# Altium PCB BopitPCB.PcbDoc
Units mil, origin at the board's own origin, x right, y up, seen from the top; angles counter-clockwise.
Board outline 3455 x 2045 mil, 2 copper layers (Top Layer, Bottom Layer); 18 components, 17 nets, 72 pads, 2 vias.
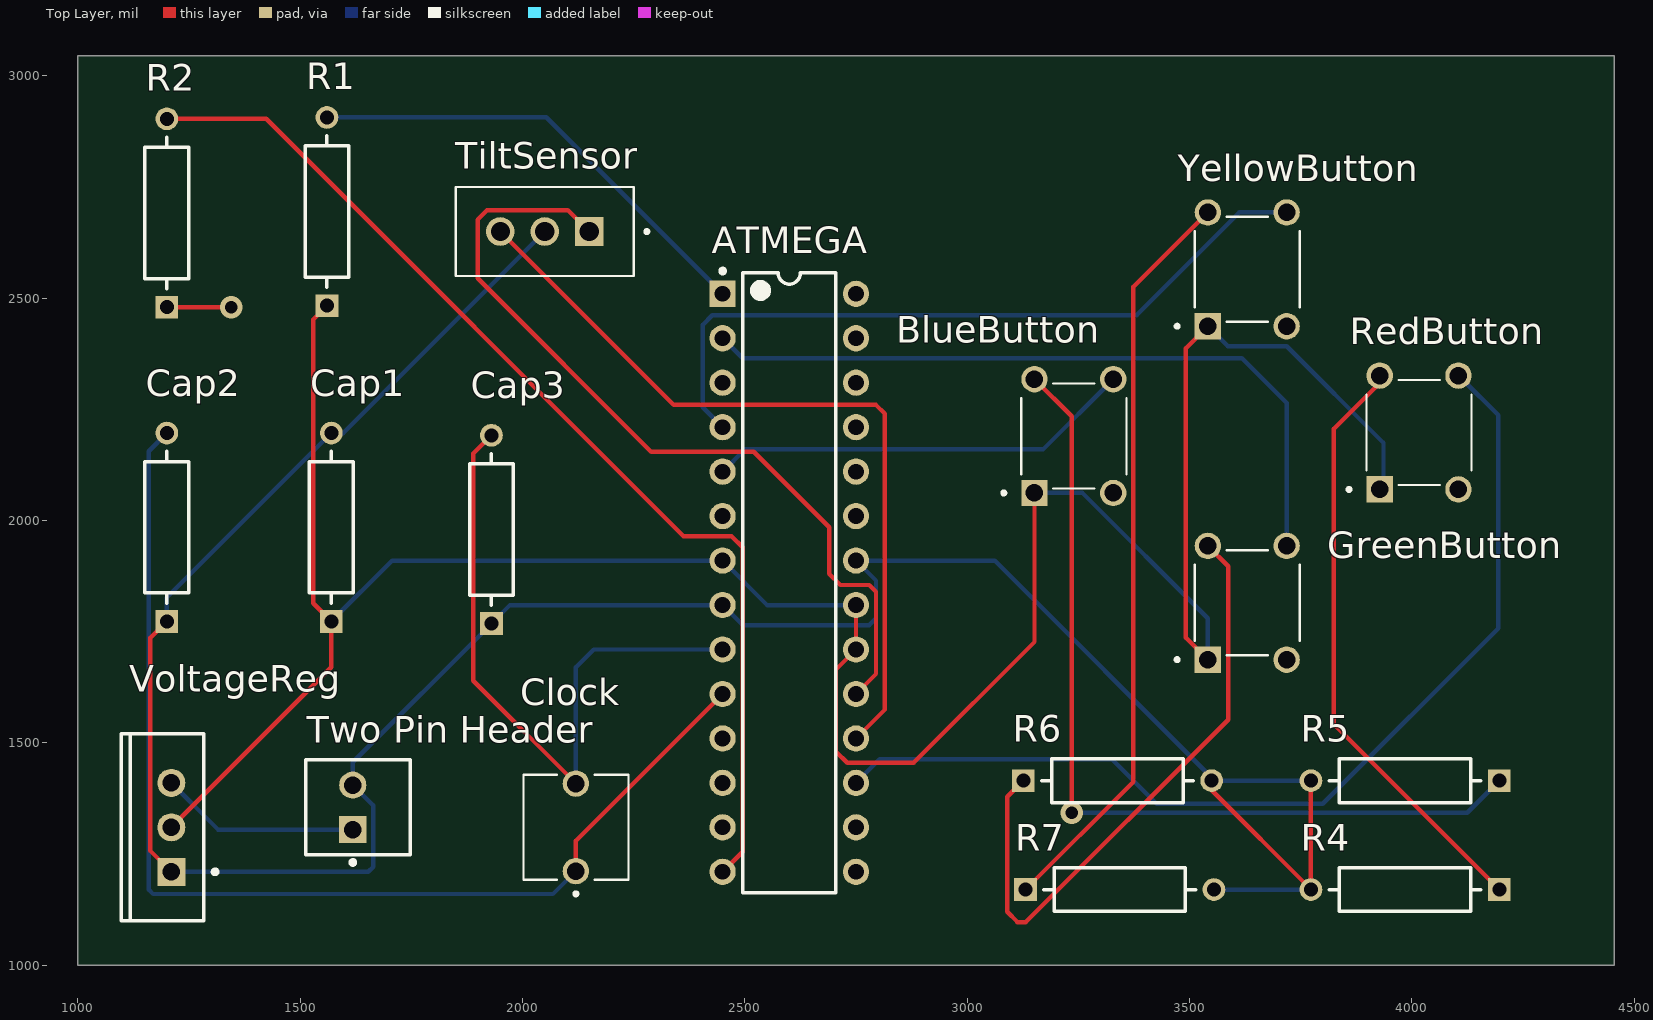
[diagram p0: Top Layer view]
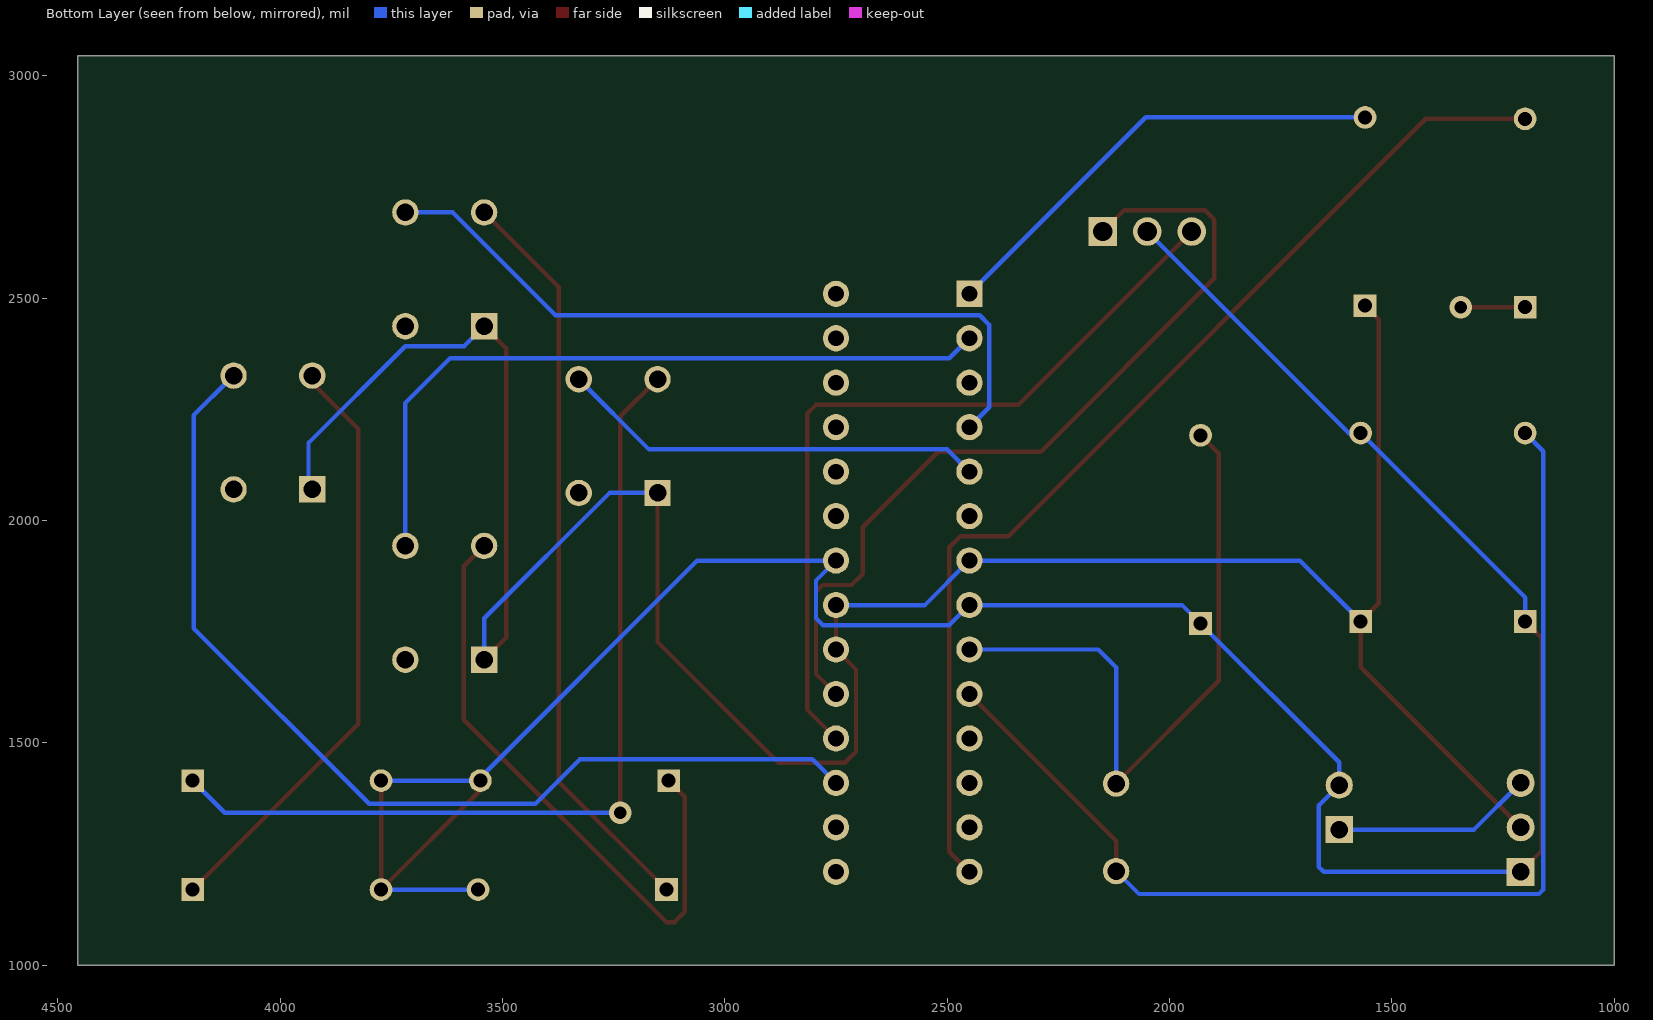
[diagram p1: Bottom Layer view, seen from below]
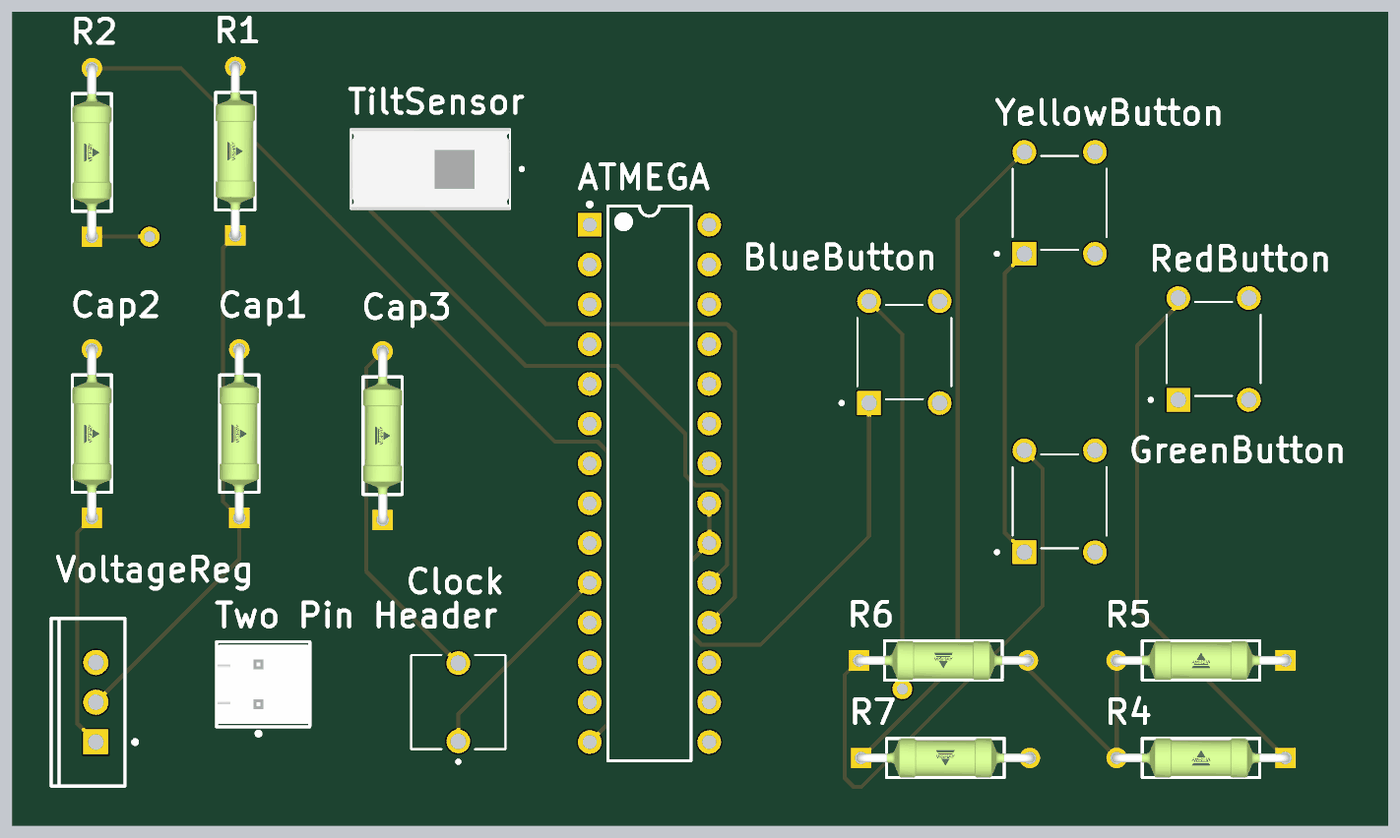
[diagram p2: 3D render of the assembled board from above, using the file's embedded part models]

## Layer stack, top to bottom
Top Solder: solder mask 0.4, Solder Resist, Dk 3.5
Top Layer: signal copper 1.4
Dielectric 1: dielectric 12.6, FR-4, Dk 4.8
Bottom Layer: signal copper 1.4
Bottom Solder: solder mask 0.4, Solder Resist, Dk 3.5

## Board outline
1000,1000 4455,1000 4455,3045 1000,3045

## Design rules (kind name [scope] priority, off if disabled: settings)
Clearance [All] p1: gap=10 ignorepadtopadclearanceinfootprint=FALSE except(0: Arc-Hole Track-Hole SMDPad-Hole THPad-Hole Via-Hole Fill-Hole Poly-Hole Region-Hole Text-Hole)
PolygonConnect [All] p1: connectstyle=Relief reliefconductorwidth=10 reliefentries=4 polygonreliefangle="90 Angle" airgapwidth=10
RoutingVias [All] p1: holewidth=28 width=50 viastyle="Through Hole" minholewidth=28 minwidth=50 maxholewidth=28 maxwidth=50
SolderMaskExpansion [All] p1: expansion=4 istentingtop=FALSE
Width [All] p1: maxlimit=10 minlimit=10 preferedwidth=10
30 further rules are at their usual default settings.

## Components (designator, comment, footprint, x,y, rotation, side; value= is the part's Value field where it differs from the comment)
ATMEGA "ATmega328-PU" 28P3 2600,1860 r0 top
BlueButton "TS02-66-70-BK-160-LCR-D" SW_TS02-66-70-BK-160-LCR-D 3240,2190 r90 top
Cap1 "SFR25000Z0000ZR500" FP-SFR25-MFG 1570,1985 r90 top
Cap2 "SFR25000Z0000ZR500" FP-SFR25-MFG 1200,1985 r90 top
Cap3 "SFR25000Z0000ZR500" FP-SFR25-MFG 1930,1980 r90 top
Clock "BUTT-2" SW_BUTT-2 2120,1310 r90 top
GreenButton "TS02-66-70-BK-160-LCR-D" SW_TS02-66-70-BK-160-LCR-D 3630,1815 r90 top
R1 "SFR25000Z0000ZR500" FP-SFR25-MFG 1560,2695 r90 top
R2 "SFR25000Z0000ZR500" FP-SFR25-MFG 1200,2691.81 r90 top
R4 "SFR25000Z0000ZR500" FP-SFR25-MFG 3985,1170 r180 top
R5 "SFR25000Z0000ZR500" FP-SFR25-MFG 3985,1415 r180 top
R6 "SFR25000Z0000ZR500" FP-SFR25-MFG 3338.19,1415 r0 top
R7 "SFR25000Z0000ZR500" FP-SFR25-MFG 3343.19,1170 r0 top
RedButton "TS02-66-70-BK-160-LCR-D" SW_TS02-66-70-BK-160-LCR-D 4016.42,2197.95 r90 top
TiltSensor "500ASSP1M2QE" SW_500ASSP1M2QE 2050,2650 r180 top
"Two Pin Header" "61900211121" FP-61900211121-MFG 1630,1355 r90 top
VoltageReg "LM1117T-3.3/NOPB" NDE0003A 1210,1310 r90 top
YellowButton "TS02-66-70-BK-160-LCR-D" SW_TS02-66-70-BK-160-LCR-D 3630,2565 r90 top

## Footprints (in the part's own frame and the unit in brackets; to place one, negate y for a bottom-side part, rotate by r counter-clockwise, add the part's x,y. Pads: shape width x height; smd on the part's side, far side on the other; paste and mask are expansions set on the pad)
28P3 [mm] "28-Pin Plastic Dual In-Line Package (PDIP)"
  rect 1.5x1.5 hole 0.9: 1(-3.81,16.51)
  round 1.5 hole 0.9: 2(-3.81,13.97) 3(-3.81,11.43) 4(-3.81,8.89) 5(-3.81,6.35) 6(-3.81,3.81) 7(-3.81,1.27) 8(-3.81,-1.27) 9(-3.81,-3.81) 10(-3.81,-6.35) 11(-3.81,-8.89) 12(-3.81,-11.43) 13(-3.81,-13.97) 14(-3.81,-16.51) 15(3.81,-16.51) 16(3.81,-13.97) 17(3.81,-11.43) 18(3.81,-8.89) 19(3.81,-6.35) 20(3.81,-3.81) 21(3.81,-1.27) 22(3.81,1.27) 23(3.81,3.81) 24(3.81,6.35) 25(3.81,8.89) 26(3.81,11.43) 27(3.81,13.97) 28(3.81,16.51)
  silkscreen extent -3.93,-17.7 2.65,17.93, body extent -3.6,-17.65 3.6,17.65, height 4.58
FP-61900211121-MFG [mm]
  rect 1.55x1.55 hole 1 paste-1000 mask+0: 1(-1.27,0.3)
  round 1.55 hole 1 paste-1000 mask+0: 2(1.27,0.3)
  silkscreen extent -3.27,-2.98 2.71,2.98, body extent -2.81,-3.08 2.81,3.08, height 0.25
FP-SFR25-MFG [mm]
  rect 1.3x1.3 hole 0.8 paste-1000 mask+0: 1(-5.38,0)
  round 1.3 hole 0.8 paste-1000 mask+0: 2(5.38,0)
  silkscreen extent -4.33,-1.25 4.33,1.25, body extent -6.13,-1.35 6.13,1.35, height 0.25
NDE0003A [mm] "FM, 3-Leads, Body 10.7x4.7mm, Pitch 2.54mm"
  rect 1.6x1.6 hole 1: 1(-2.54,0)
  round 1.6 hole 1: 2(0,0) 3(2.54,0)
  silkscreen extent -5.35,-2.63 5.35,2.85, body extent -5.4,-1.9 5.4,2.9, height 19.4
SW_500ASSP1M2QE [mm]
  rect 1.635x1.635 / inner round 1.635 / far side rect 1.635x1.635 hole 1.09: 1(-2.54,0)
  round 1.635 hole 1.09: 2(0,0) 3(2.54,0)
  silkscreen extent -5.93,-2.54 5.08,2.54, body extent -5.08,-2.54 5.08,2.54, height 13.32
SW_BUTT-2 [mm]
  round 1.508 hole 1: 1(-2.5,0) 2(2.5,0)
  silkscreen extent -3.9,-3 3,3
SW_TS02-66-70-BK-160-LCR-D [mm]
  rect 1.508x1.508 / inner round 1.508 / far side rect 1.508x1.508 hole 1: 1(-3.25,2.25)
  round 1.508 hole 1: 2(3.25,2.25) 3(-3.25,-2.25) 4(3.25,-2.25)
  silkscreen extent -3.35,-3 3,4.1

## Part data
ATMEGA: library part CMP-0095-00015-2, "8-bit AVR Microcontroller, 32KB Flash, 1KB EEPROM, 2KB SRAM, 28-pin PDIP, Industrial Grade (-40°C to 85°C)", ComponentLink1Description="Manufacturer URL", ComponentLink1URL=http://www.atmel.com/, ComponentLink2Description="ATmega48A/48PA/88A/88PA/168A/168PA/328/328P Datasheet", ComponentLink2URL=http://www.atmel.com/dyn/resources/prod_documents/8271.pdf, ComponentLink3Description="ATmega48A/48PA/88A/88PA/168A/168PA/328/328P Summary", ComponentLink3URL=http://www.atmel.com/dyn/resources/prod_documents/8271S.pdf, DatasheetVersion="revD, May-2011", PackageDescription="28-lead (0.300\"/7.62mm Wide) Plastic Dual Inline Package (PDIP)", PackageReference=28P3, PackageVersion="revB, Sep-2001", RevisionNote="DatasheetVersion updated. URLs added."
BlueButton GreenButton RedButton YellowButton: library part CMP-031-000000-1, "6 x 6 mm, 7 mm Actuator Height, 160 gf, Black, Long Crimped, Through Hole, SPST, Tactile Switch", Package=None, Availability="In Stock", Check_prices=https://www.snapeda.com/parts/TS02-66-70-BK-160-LCR-D/CUI+Devices/view-part/?ref=eda, Component Type=Standard, CUI_purchase_URL=https://www.cuidevices.com/product/switches/tactile-switches/ts02-series?utm_source=snapeda.com&utm_medium=referral&utm_campaign=snapedaBOM, Design Item ID=TS02-66-70-BK-160-LCR-D, MF="CUI Devices", MP=TS02-66-70-BK-160-LCR-D, Pin Count=4, Price=None, Purchase-URL=https://pricing.snapeda.com/search/part/TS02-66-70-BK-160-LCR-D/?ref=eda, SnapEDA_Link=https://www.snapeda.com/parts/TS02-66-70-BK-160-LCR-D/CUI+Devices/view-part/?ref=snap, Source=TS02-66-70-BK-160-LCR-D.SchLib
Cap1 Cap2 Cap3 R1 R2 R4 R5 R6 R7: library part CMP-02408-000013-1, "RES 0 OHM JUMPER MF", Case/Package=Conformal, Max Operating Temperature=155°C, Min Operating Temperature=-55°C, Package Quantity=5000, Resistance=0R, Resistor Type="Metal Film", Contact Plating=Tin, Diameter=2.5mm, Lead Diameter=0.58mm, Lead Free="Lead Free", Length=6.5mm, Military Standard=Not, Mount="Through Hole", Packaging="Cut Tape", Radiation Hardening=No, RoHS Compliant=Yes, Series=SFR25, Technology="METAL FILM", Termination=Axial, Weight=0.007055oz
Clock: library part CMP-025-000000-1, "Tactile Switches MINI PUSH BUTTON SWITCH 2-PIN QTY. 4", Package=None, Availability="In Stock", Check_prices=https://www.snapeda.com/parts/BUTT-2/Gravitech/view-part/?ref=eda, Component Type=Standard, Design Item ID=BUTT-2, MF=Gravitech, MP=BUTT-2, Pin Count=2, Price=None, Purchase-URL=https://pricing.snapeda.com/search/part/BUTT-2/?ref=eda, SnapEDA_Link=https://www.snapeda.com/parts/BUTT-2/Gravitech/view-part/?ref=snap, Source=BUTT-2.SchLib
TiltSensor: library part CMP-027-000000-1, "1P2T Sub-miniature Slide Switch", Package=None, Availability="In Stock", Check_prices=https://www.snapeda.com/parts/500ASSP1M2QE/E-Switch/view-part/?ref=eda, Component Type=Standard, Design Item ID=500ASSP1M2QE, MF=E-Switch, MP=500ASSP1M2QE, Pin Count=3, Price=None, Purchase-URL=https://pricing.snapeda.com/search/part/500ASSP1M2QE/?ref=eda, SnapEDA_Link=https://www.snapeda.com/parts/500ASSP1M2QE/E-Switch/view-part/?ref=snap, Source=500ASSP1M2QE.SchLib
"Two Pin Header": library part CMP-1502-00584-2, "CONN HEADER VERT 2POS 2.54MM", Color=Beige, Current Rating=3A, Flammability Rating="UL94 V-0", Insulation Resistance=1GR, Max Operating Temperature=105°C, Min Operating Temperature=-40°C, Package Quantity=1000, Voltage Rating=250V, Connector Type=Header, Contact Finish - Mating=TIN, Contact Gender=Male, Contact Material="Copper Alloy", Contact Mating Length=0.295inch, Contact Plating=Tin, Contact Shape=Square, Contact Type="Male Pin", Fastening Type=Friction, Gender=Male, Height=14.2mm, Housing Material=Nylon, Insulation Color=Beige, Insulation Material=Nylon, Length=5.8mm, Mount="Through Hole", Number of Contacts=2, Number of Positions=2, Number of Rows=1, Packaging=Bulk, Pitch=2.54mm, RoHS Compliant=Yes, Series=WR-WTB, Termination="Through Hole", Width=5.12mm
VoltageReg: library part CMP-0062-02494-3, "800mA Low-Dropout Linear Regulator, 3-pin TO-220, Pb-Free", Manufacturer="Texas Instruments", PackageTopMarking=NSUZXYTTE#*LM1117T*3.3, PowerWise=N, ComponentLink1Description="Datasheet URL", ComponentLink1URL=http://www.ti.com/general/docs/lit/getliterature.tsp?genericPartNumber=LM1117-N&fileType=pdf, CompType="LDO IC", PackageDescription="TO-220, Molded, 3 Lead, Straight", PackageReference=NDE0003A, PinCount=3, RoHS=Y

## Via types
v1: diameter 50, hole 28, Top Layer to Bottom Layer, 2 vias

## Nets (pads, with @x,y where several pads share a name; then routed paths per layer and width w, separated by ;. In a path a pad name is that pad's centre, name@x,y a point inside that pad or via, vN(x,y) a via of type N, cw(c..) or ccw(c..) an arc to the next point about the centre after c; other vN are vias at no path point)
GND: "Two Pin Header.2" ATMEGA.8 ATMEGA.22 Cap1.2 Cap2.1 Cap3.1 R4.2 R5.2 R6.2 R7.2 TiltSensor.2 VoltageReg.1 | length 6081.1
  Top Layer w10: Cap2.1 1163,1736.19 1163,1257 VoltageReg.1 ; R6.2 3550,1393.19 R4.2 R5.2
  Bottom Layer w10: Cap2.1 1200,1826.81 Cap1.2 1596.81,2196.81 TiltSensor.2 ; VoltageReg.1 1653,1210 1664,1221 1664,1359.19 1618.19,1405 1618.19,1456.38 Cap3.1 1971.81,1810 ATMEGA.8 2495,1765 2780,1765 2795,1780 2795,1865 ATMEGA.22 3061.81,1910 3556.81,1415 R5.2 ; R7.2 R4.2
NetATMEGA_1: ATMEGA.1 R1.2 | length 1054.4
  Bottom Layer w10: R1.2 2053.19,2906.81 ATMEGA.1
NetATMEGA_2: ATMEGA.2 GreenButton.4 | length 1650.3
  Bottom Layer w10: ATMEGA.2 2495,2365 3618,2365 3718.58,2264.42 GreenButton.4
NetATMEGA_4: ATMEGA.4 YellowButton.4 | length 1667
  Bottom Layer w10: ATMEGA.4 2405,2255 2405,2440 2427,2462 3381.05,2462 3612,2692.95 YellowButton.4
NetATMEGA_5: ATMEGA.5 BlueButton.4 | length 964.7
  Bottom Layer w10: ATMEGA.5 2500,2160 3170.63,2160 BlueButton.4
NetATMEGA_7: ATMEGA.7 ATMEGA.20 ATMEGA.21 BlueButton.1 Cap1.1 GreenButton.1 R1.1 RedButton.1 VoltageReg.2 YellowButton.1 | length 5890.3
  Top Layer w10: VoltageReg.2 1570,1670 Cap1.1 1529,1814.19 1529,2452.19 R1.1 ; ATMEGA.21 ATMEGA.20 2705,1665 2705,1480 2730,1455 2879.42,1455 3151.42,1727 BlueButton.1 ; GreenButton.1 3492,1736.47 3492,2387.63 YellowButton.1
  Bottom Layer w10: Cap1.1 1706.81,1910 ATMEGA.7 2550,1810 ATMEGA.21 ; BlueButton.1 3259.32,2062.05 3541.42,1779.95 GreenButton.1 ; YellowButton.1 3586.47,2392 3719,2392 3936.42,2174.58 RedButton.1@3936.42,2062.05
NetATMEGA_9: ATMEGA.9 Cap3.2 Clock.2 | length 1504.2
  Top Layer w10: Cap3.2 1889,2150.81 1889,1639.43 Clock.2
  Bottom Layer w10: Clock.2 2120,1670 2160,1710 ATMEGA.9
NetATMEGA_10: ATMEGA.10 Cap2.2 Clock.1 | length 2565.4
  Top Layer w10: Clock.1 2120,1280 ATMEGA.10
  Bottom Layer w10: Cap2.2 1159,2155.81 1159,1170 1169,1160 2068.42,1160 Clock.1
NetATMEGA_14: ATMEGA.14 R2.2 | length 2442.8
  Top Layer w10: R2.2 1423.38,2903.62 2362,1965 2470,1965 2495,1940 2495,1255 ATMEGA.14
NetATMEGA_17: ATMEGA.17 RedButton.4 | length 2265.7
  Bottom Layer w10: ATMEGA.17 2803,1463 3326,1463 3426,1363 3800,1363 4195,1758 4195,2236.54 RedButton.4@4113.58,2317.95
NetATMEGA_18: ATMEGA.18 TiltSensor.3 | length 1791.8
  Top Layer w10: TiltSensor.3 2340,2260 2795,2260 2815,2240 2815,1575 ATMEGA.18
NetATMEGA_19: ATMEGA.19 TiltSensor.1 | length 1909.7
  Top Layer w10: TiltSensor.1 2102,2698 1920,2698 1899,2677 1899,2545 2289,2155 2520,2155 2690,1985 2690,1880 2715,1855 2780,1855 2795,1840 2795,1655 ATMEGA.19
NetBlueButton_2: BlueButton.2 R5.1 | length 2001.2
  Top Layer w10: BlueButton.2 3235,2234.37 v1(3235,1343)
  Bottom Layer w10: v1(3235,1343) 4124.81,1343 R5.1
NetGreenButton_2: GreenButton.2 R6.1 | length 1414.9
  Top Layer w10: R6.1 3090,1378.62 3090,1120 3113,1097 3132,1097 3587,1552 3587,1897.37 GreenButton.2
NetR4_1: R4.1 RedButton.2 | length 1348.1
  Top Layer w10: RedButton.2@3936.42,2317.95 3825,2206.54 3825,1541.81 R4.1
NetR7_1: R7.1 YellowButton.2 | length 1692.8
  Top Layer w10: R7.1 3374,1412.62 3374,2525.54 YellowButton.2
VCC: "Two Pin Header.1" VoltageReg.3 | length 451.7
  Bottom Layer w10: VoltageReg.3 1315,1305 1618.19,1305
pads on no net: ATMEGA.3 ATMEGA.6 ATMEGA.11 ATMEGA.12 ATMEGA.13 ATMEGA.15 ATMEGA.16 ATMEGA.23 ATMEGA.24 ATMEGA.25 ATMEGA.26 ATMEGA.27 ATMEGA.28 BlueButton.3 GreenButton.3 R2.1 RedButton.3 YellowButton.3
copper on no net: | length 145
  Top Layer w10: 1200,2480 v1(1345,2480)